# Altium PCB Key-HT16K23.PcbDoc
Units mil, origin at the board's own origin, x right, y up, seen from the top; angles counter-clockwise.
Board outline 1960 x 1940 mil, 2 copper layers (Top Layer, Bottom Layer); 43 components, 33 nets, 196 pads, 175 vias.
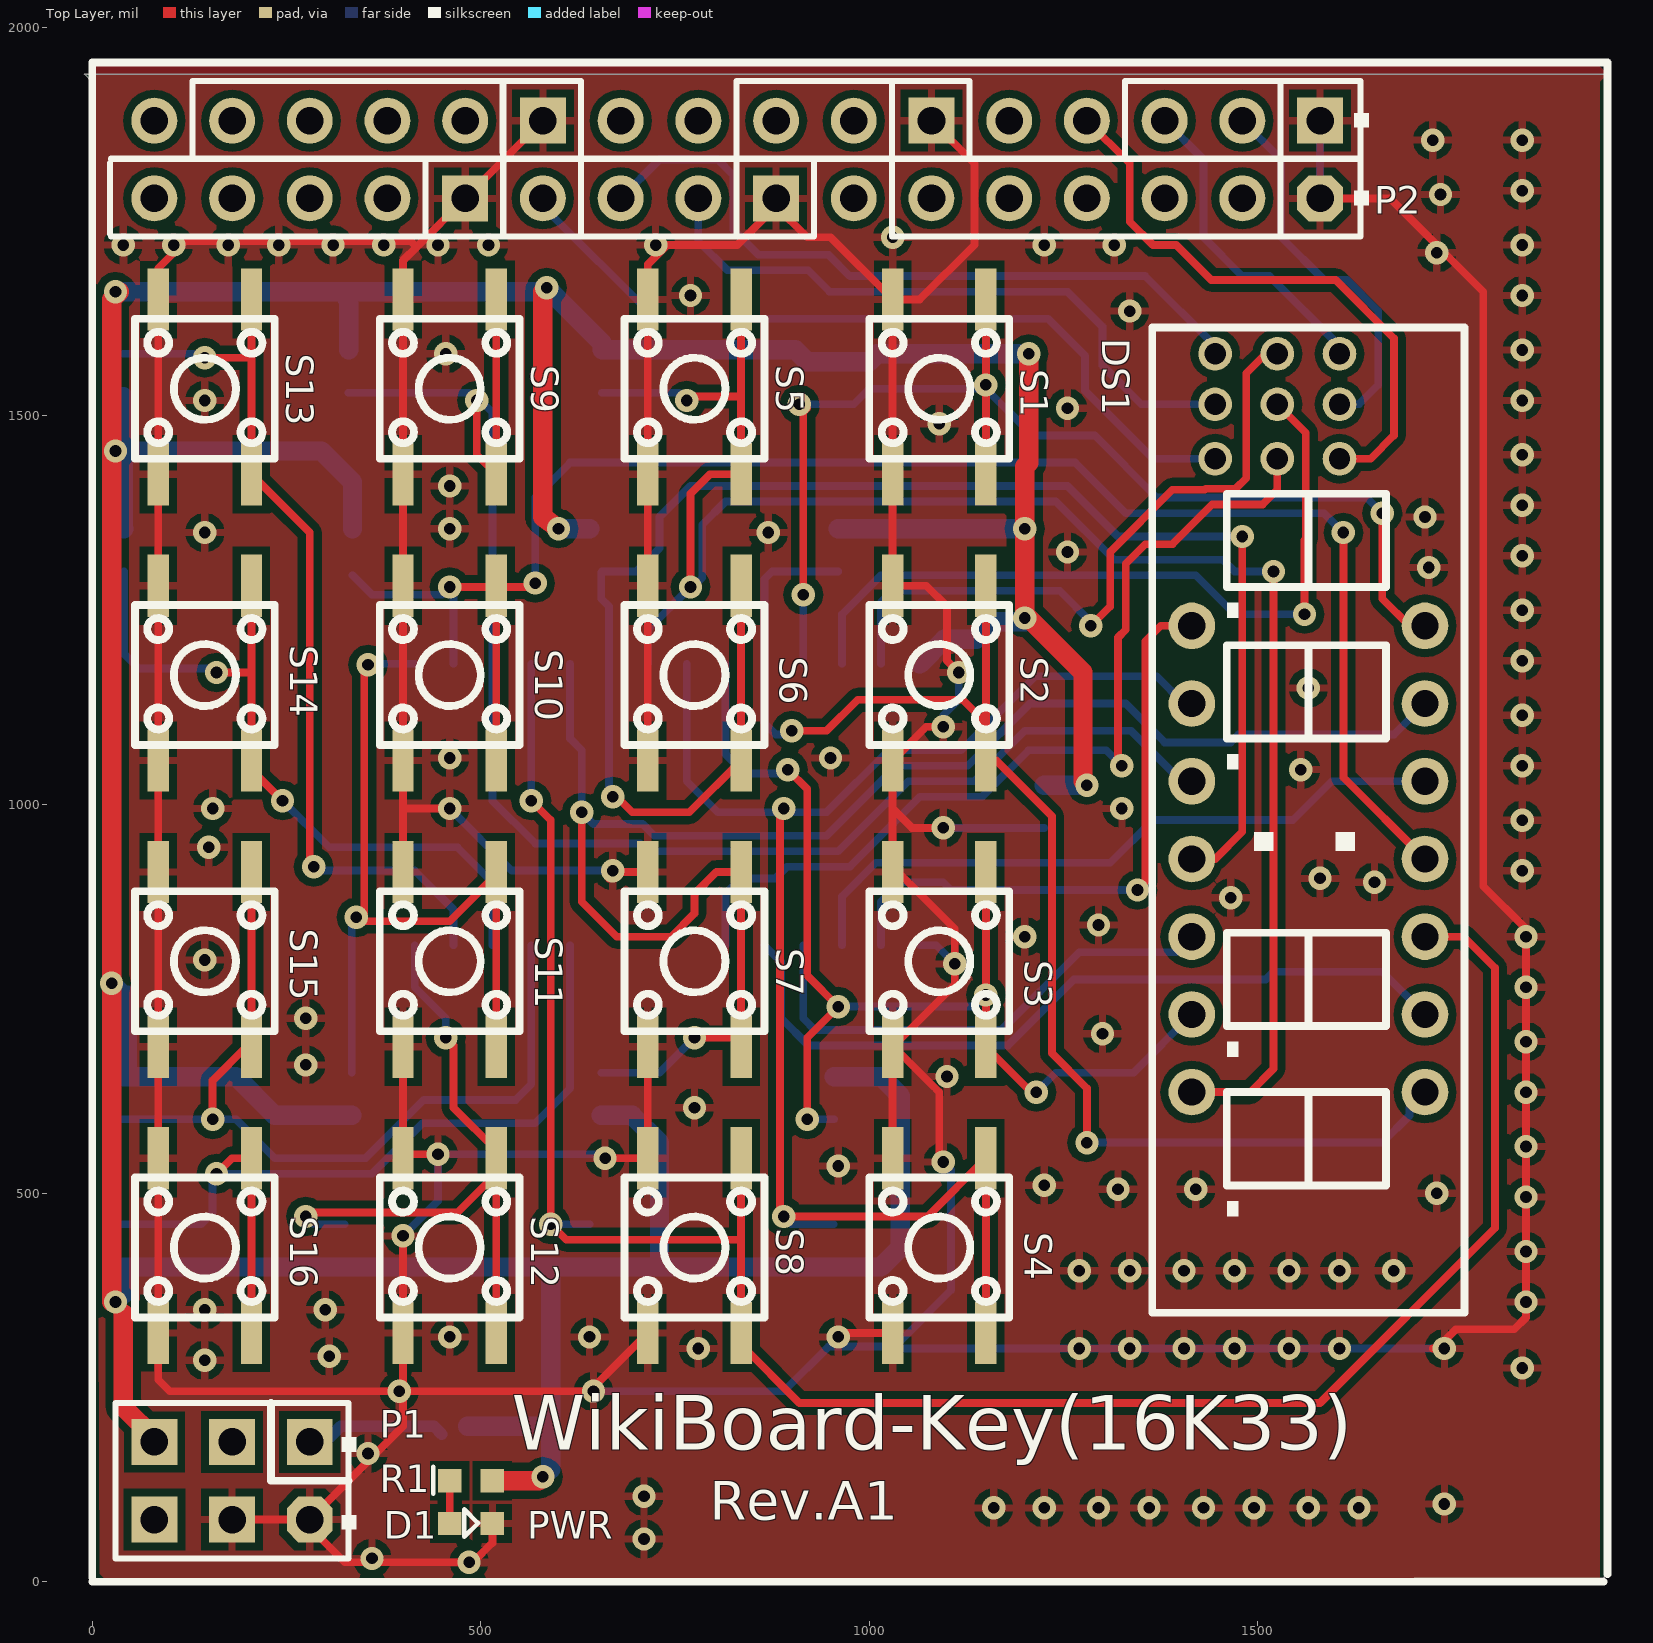
[diagram p0: Top Layer view]
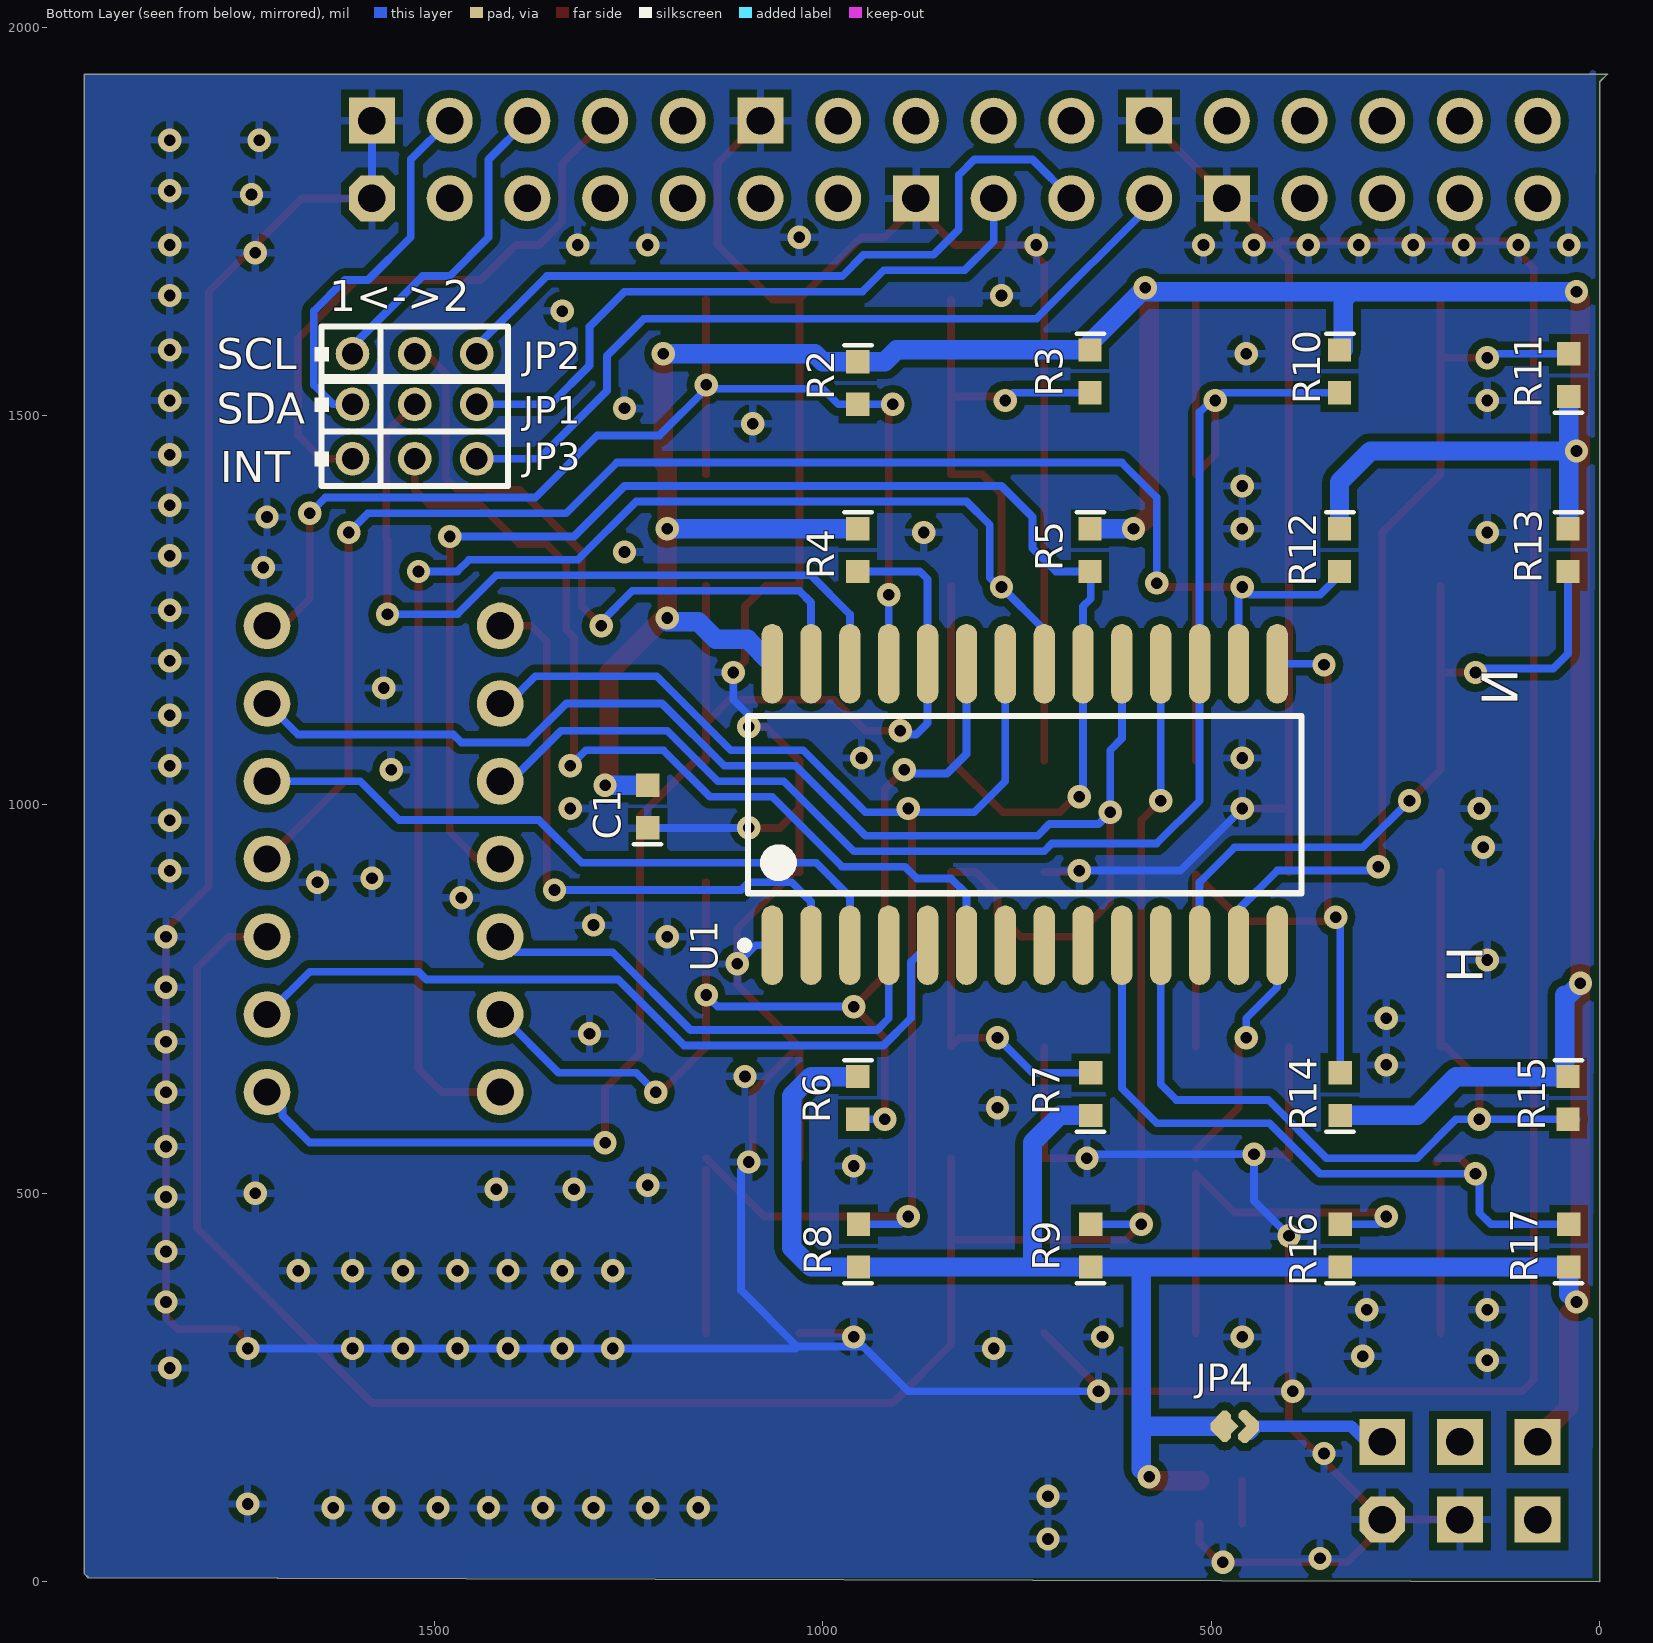
[diagram p1: Bottom Layer view, seen from below]

## Layer stack, top to bottom
Top Solder: solder mask 0.4, Solder Resist, Dk 3.5
Top Layer: signal copper 1.4
Dielectric1: dielectric 12.6, FR-4, Dk 4.8
Bottom Layer: signal copper 1.4
Bottom Solder: solder mask 0.4, Solder Resist, Dk 3.5

## Board outline
1945,5 1950,10 1950,1940 -10,1940 0,1930 0,0

## Design rules (kind name [scope] priority, off if disabled: settings)
Clearance [All] p1: gap=10
PolygonConnect [All] p1: connectstyle=Relief reliefconductorwidth=10 reliefentries=4 polygonreliefangle="90 Angle" airgapwidth=10
RoomDefinition Key-HT16K23 [InComponentClass('Key-HT16K23')] p1: confinementstyle=ConfineIn formatcopy=TRUE lockcomponents=FALSE outline -25,-5 1965,-5 1965,1955 -25,1955
RoutingVias [All] p1: holewidth=15 width=30 viastyle="Through Hole" minholewidth=10 minwidth=20 maxholewidth=28 maxwidth=50
SolderMaskExpansion [All] p1: expansion=4
Width [All] p1: maxlimit=30 minlimit=10 preferedwidth=10
29 further rules are at their usual default settings.

## Components (designator, comment, footprint, x,y, rotation, side; value= is the part's Value field where it differs from the comment)
C1 "0.1uF" 0603M 1225,970 r90 bottom
D1 "RED" 0603pn 460,75 r0 top
DS1 "7SEG-4-Dot" 7SGLED-4-Dot-0.28 1415,1230 r270 top
JP1 "Jumper3" HDR1X3/2.00mm 1605,1515 r180 bottom
JP2 "Jumper3" HDR1X3/2.00mm 1605,1580 r180 bottom
JP3 "Jumper3" HDR1X3/2.00mm 1605,1445 r180 bottom
JP4 "Jumper2-2" JP2_SMD 470,200 r0 bottom
P1 "WIKIPWR" WIKIPWR-6P 280,180 r180 top locked
P2 "WIKIPRHL-R" WIKIPRHL-R 1580,1880 r180 top locked
R1 "1K" 0603M 460,130 r0 top
R2 "10K" 0603M 955,1570 r270 bottom
R3 "10K" 0603M 656,1585 r270 bottom
R4 "10K" 0603M 955,1355 r270 bottom
R5 "10K" 0603M 656,1355 r270 bottom
R6 "10K" 0603M 955,650 r270 bottom
R7 "10K" 0603M 655,600 r90 bottom
R8 "10K" 0603M 954,405 r90 bottom
R9 "10K" 0603M 655,405 r90 bottom
R10 "10K" 0603M 335,1585 r270 bottom
R11 "10K" 0603M 40,1525 r90 bottom
R12 "10K" 0603M 335,1355 r270 bottom
R13 "10K" 0603M 41,1355 r270 bottom
R14 "10K" 0603M 334,600 r90 bottom
R15 "10K" 0603M 41,650 r270 bottom
R16 "10K" 0603M 334,405 r90 bottom
R17 "10K" 0603M 40,405 r90 bottom
S1 "SW-PB" KEY-4.5X4.5-SMD 1090,1535 r270 top
S2 "SW-PB" KEY-4.5X4.5-SMD 1090,1166.67 r270 top
S3 "SW-PB" KEY-4.5X4.5-SMD 1090,798.33 r270 top
S4 "SW-PB" KEY-4.5X4.5-SMD 1090,430 r270 top locked
S5 "SW-PB" KEY-4.5X4.5-SMD 775,1535 r270 top
S6 "SW-PB" KEY-4.5X4.5-SMD 775,1166.67 r270 top
S7 "SW-PB" KEY-4.5X4.5-SMD 775,798.33 r270 top
S8 "SW-PB" KEY-4.5X4.5-SMD 775,430 r270 top
S9 "SW-PB" KEY-4.5X4.5-SMD 460,1535 r270 top
S10 "SW-PB" KEY-4.5X4.5-SMD 460,1166.67 r270 top
S11 "SW-PB" KEY-4.5X4.5-SMD 460,798.33 r270 top
S12 "SW-PB" KEY-4.5X4.5-SMD 460,430 r270 top
S13 "SW-PB" KEY-4.5X4.5-SMD 145,1535 r270 top
S14 "SW-PB" KEY-4.5X4.5-SMD 145,1166.67 r270 top
S15 "SW-PB" KEY-4.5X4.5-SMD 145,798.33 r270 top
S16 "SW-PB" KEY-4.5X4.5-SMD 145,430 r270 top
U1 "HT16K23" SO28_M 740,1000 r90 bottom

## Footprints (in the part's own frame and the unit in brackets; to place one, negate y for a bottom-side part, rotate by r counter-clockwise, add the part's x,y. Pads: shape width x height; smd on the part's side, far side on the other; paste and mask are expansions set on the pad)
7SGLED-4-Dot-0.28 [mil]
  round 60 hole 35: 1(0,0) 2(100,0) 3(200,0) 4(300,0) 5(400,0) 6(500,0) 7(600,0) 8(600,300) 9(500,300) 10(400,300) 11(300,300) 12(200,300) 13(100,300) 14(0,300)
  silkscreen extent -384,-51 884,351
0603M [mil]
  rect 30x30 smd: 1(0,0) 2(55,0)
  silkscreen extent -21,-17 -21,18, body extent -5,-15 60,15, height 43
0603pn [mil]
  rect 30x30 smd: 1(0,0) 2(55,0)
  silkscreen extent 19,-17 36,18
HDR1X3/2.00mm [mm]
  round 1.1 hole 0.7: 1(0,0) 2(2.032,0) 3(4.064,0)
  silkscreen extent -1.24,-0.89 5.08,0.89
JP2_SMD [mil]
  oct 15x30 smd rot 45: 1(-18,-8) 2(18,7)
  oct 15.75x30 smd rot 135: 1(-18,8)
  rect 26x26 smd rot 45: 2(13,0)
  oct 15x30 smd rot 135: 2(18,-7)
KEY-4.5X4.5-SMD [mil]
  rect 80x27.56 smd: 1(-115,-60) 1(110,-60) 2(-115,60) 2(110,60)
  silkscreen extent -90,-90 90,90
SO28_M [mm] "28-Pin Plastic Small Outline Integrated Circuit 1.27 mm Pitch, IPC Low Density"
  oval 2.6x0.7 smd: 1(-4.6,8.255) 2(-4.6,6.985) 3(-4.6,5.715) 4(-4.6,4.445) 5(-4.6,3.175) 6(-4.6,1.905) 7(-4.6,0.635) 8(-4.6,-0.635) 9(-4.6,-1.905) 10(-4.6,-3.175) 11(-4.6,-4.445) 12(-4.6,-5.715) 13(-4.6,-6.985) 14(-4.6,-8.255) 15(4.6,-8.255) 16(4.6,-6.985) 17(4.6,-5.715) 18(4.6,-4.445) 19(4.6,-3.175) 20(4.6,-1.905) 21(4.6,-0.635) 22(4.6,0.635) 23(4.6,1.905) 24(4.6,3.175) 25(4.6,4.445) 26(4.6,5.715) 27(4.6,6.985) 28(4.6,8.255)
  silkscreen extent -4.72,-9.05 2.9,9.28, body extent -3.8,-9.06 3.8,9.06, height 2.65
WIKIPRHL-R [mm] "Connector; Header; 16x2 Position"
  rect 1.5x1.5 hole 0.9: 1(0,0) 11(12.7,0) 16(17.78,2.54) 21(25.4,0) 24(27.94,2.54)
  oct 1.5x1.5 hole 0.9: 2(0,2.54)
  round 1.5 hole 0.9: 3(2.54,0) 4(2.54,2.54) 5(5.08,0) 6(5.08,2.54) 7(7.62,0) 8(7.62,2.54) 9(10.16,0) 10(10.16,2.54) 12(12.7,2.54) 13(15.24,0) 14(15.24,2.54) 15(17.78,0) 17(20.32,0) 18(20.32,2.54) 19(22.86,0) 20(22.86,2.54) 22(25.4,2.54) 23(27.94,0) 25(30.48,0) 26(30.48,2.54) 27(33.02,0) 28(33.02,2.54) 29(35.56,0) 30(35.56,2.54) 31(38.1,0) 32(38.1,2.54)
  silkscreen extent -1.6,-1.3 39.55,3.78, body extent -1.3,-1.63 39.43,4.04, height 8.51
WIKIPWR-6P [mm] "Connector; Header; 3x2 Position"
  rect 1.5x1.5 hole 0.9: 1(0,0) 3(2.54,0) 4(2.54,2.54) 5(5.08,0) 6(5.08,2.54)
  oct 1.5x1.5 hole 0.9: 2(0,2.54)
  silkscreen extent -1.52,-1.27 6.35,3.81, body extent -1.21,-1.65 6.44,4.02, height 8.51

## Part data
C1: library part Cap, "Capacitor"
D1: library part LED0, "Typical INFRARED GaAs LED"
DS1: "Black Surface HER 7-Segment Display"
JP4: "Jumper2"
P1: "PWR HDR"
P2: "Header, 16-Pin, Dual row"
R1 R2 R3 R4 R5 R6 R7 R8 R9 R10 R11 R12 R13 R14 R15 R16 R17: library part Res2, "Resistor"
S1 S2 S3 S4 S5 S6 S7 S8 S9 S10 S11 S12 S13 S14 S15 S16: "Switch"
U1: "LCD Driver with keyscan"

## Via types
v1: diameter 30, hole 15, Top Layer to Bottom Layer, 175 vias

## Nets (pads, with @x,y where several pads share a name; then routed paths per layer and width w, separated by ;. In a path a pad name is that pad's centre, name@x,y a point inside that pad or via, vN(x,y) a via of type N, cw(c..) or ccw(c..) an arc to the next point about the centre after c; other vN are vias at no path point)
COM0: DS1.1 U1.2 | length 793
  Top Layer w10: v1(1345,890) 1355,900 1355,1210 1375,1230 DS1.1
  Bottom Layer w10: U1.2 1015,875 1040,900 1095,900 1105,890 v1(1345,890)
COM1: DS1.12 U1.3 | length 874.2
  Bottom Layer w10: U1.3 965,881.72 1008.28,925 1310,925 1365,980 1545,980 1595,1030 DS1.12
COM2: DS1.5 U1.4 | length 649.8
  Bottom Layer w10: U1.4 915,725 930,710 1170,710 1270,810 1395,810 DS1.5
COM3: DS1.9 U1.5 | length 1007.8
  Bottom Layer w10: U1.5 886.22,797.68 886.22,725.5 921.72,690 1178.28,690 1263.28,775 1510,775 1520,785 1660,785 DS1.9
GND: C1.1 D1.2 P1.2 P1.4 P2.1 P2.2 P2.11 P2.16 P2.21 P2.24 S1.1 S2.1 S3.1 S4.1 S5.1 S6.1 S7.1 S8.1 S9.1 S10.1 S11.1 S12.1 S13.1 S14.1 S15.1 S16.1 U1.1 | length 11774.5
  Top Layer w10: P1.4 P1.2 ; v1(400,445) 400,320 v1@400,245 ; S11.1@400,688.33 400,545 405,550 v1(445,550) ; S11.1@400,913.33 400,995 ; v1(460,995) 400,995 ; D1.2 515,50 490,25 325,25 280,70 P1.2 ; P2.21 P2.24 417.5,1717.5 ; v1(645,245) v1@640,245 ; v1(660,545) 715,545 S7.1@715,688.33 ; v1(670,915) 665,910 665,905 673.33,913.33 S7.1@715,913.33 ; S8.1@715,320 v1@640,245 ; S6.1@715,1056.67 715,1281.67 715,1425 715,1650 715,1695 740,1720 830,1720 880,1770 920,1730 950,1730 S1.1@1030,1650 ; v1(960,315) 965,320 S4.1@1030,320 ; S4.1@1030,545 S3.1@1030,688.33 ; P2.11 1135.47,1824.53 1135.47,1720.47 1065,1650 S1.1@1030,1650 ; v1(1095,540) 1090,545 1090,630 1031.67,688.33 S3.1@1030,688.33 ; v1(1095,970) 1055,970 1030,995 1030,1005 ; v1(1095,1100) 1073.33,1100 1030,1056.67 1030,1005 ; v1(1115,1170) 1100,1185 1100,1255 1073.33,1281.67 1030,1281.67 1030,1425 S1.1@1030,1650 ; P2.2 1670,1780 1790,1660 1790,895 1845,840 1845,340 1830,325 1755,325 1730,300 v1@1725,300 ; P1.2 400,200 v1@400,245 ; v1@400,245 v1@640,245 ; v1@400,245 100,245 85,260 85,320 85,545 85,688.33 85,913.33 85,1056.67 85,1281.67 85,1425 85,1650 85,1690 120,1725 410,1725 417.5,1717.5 ; 400,995 400,1056.67 400,1281.67 400,1425 400,1650 400,1700 417.5,1717.5 ; S3.1@1030,688.33 1110,768.33 v1(1110,795) 1110,840 1036.67,913.33 1030,913.33 1030,1005
  Bottom Layer w10: v1(400,445) 445,490 v1(445,550) 655,550 v1(660,545) ; v1(460,995) 540,915 v1(670,915) ; v1(645,245) 890,245 947.5,302.5 1032.5,302.5 ; U1.1 1086.1,818.9 v1(1110,795) ; v1(1095,540) 1105,530 1105,375 1032.5,302.5 ; v1(1095,970) C1.1 ; v1(1095,1100) 1095,1115 1115,1135 v1(1115,1170) ; P2.2 P2.1 ; v1@1725,300 1035,300 1032.5,302.5
  other v1: 485,25 360,30 710,55 1160,95 1225,95 1295,95 1360,95 1430,95 1495,95 1565,95 1630,95 1740,100 710,110 355,165 395,245 1840,275 145,285 305,290 780,300 1270,300 1335,300 1405,300 1470,300 1540,300 1605,300 1740,300 460,315 640,315 145,350 300,350 1845,360 1270,400 1335,400 1405,400 1470,400 1540,400 1605,400 1675,400 1845,425 1845,495 1730,500 1320,505 1420,505 1225,510 960,535 1845,560 775,610 1845,630 1100,650 275,665 1845,695 1300,705 275,725 1845,765 145,800 1200,830 1845,830 1295,845 1465,880 1650,900 1580,905 1840,915 150,945 1840,980 155,995 1325,995 1555,1045 1840,1050 460,1060 950,1060 1840,1115 1565,1150 1840,1185 1840,1250 1720,1305 1840,1320 1255,1325 145,1350 870,1350 460,1355 1715,1370 1840,1385 1840,1385 460,1410 1840,1450 1090,1490 1255,1510 145,1520 1840,1520 455,1580 1840,1585 1335,1635 770,1655 1840,1655 1730,1710 40,1720 105,1720 175,1720 240,1720 310,1720 375,1720 445,1720 510,1720 725,1720 1225,1720 1315,1720 1840,1720 1030,1730 1735,1785 1840,1790 1725,1855 1840,1855
HT_INT: JP3.2 U1.6 | length 1201.6
  Top Layer w10: v1(1325,1050) 1320,1055 1320,1215 1330,1225 1330,1310 1355,1335 1390,1335 1441.25,1386.25 1506.25,1386.25 1525,1405 JP3.2
  Bottom Layer w10: U1.6 815,885 835,905 878.99,905 893.99,920 975,920 1065,1010 1145,1010 1205,1070 1305,1070 v1(1325,1050)
HT_INT1: JP3.1 P2.7 | length 762.3
  Top Layer w10: P2.7 1335,1825 1335,1750 1365,1720 1395,1720 1440,1675 1600,1675 1675,1600 1675,1475 1645,1445 JP3.1
HT_INT2: JP3.3 P2.22 | length 1036
  Bottom Layer w10: P2.22 580,1770 725,1625 1230,1625 1277.5,1577.5 1277.5,1532.5 1365,1445 JP3.3
HT_SCL: JP2.2 U1.27 | length 881.7
  Top Layer w10: v1(1285,1230) 1310,1255 1310,1325 1390,1405 1431.72,1405 1432.97,1406.25 1471.25,1406.25 1485,1420 1485,1555 1510,1580 JP2.2
  Bottom Layer w10: U1.27 1015,1260 1030,1275 1245,1275 1285,1235 v1(1285,1230)
HT_SCL1: JP2.1 P2.5 | length 413.7
  Bottom Layer w10: P2.5 1430,1830 1430,1730 1480,1680 1515,1680 1605,1590 JP2.1
HT_SCL2: JP2.3 P2.20 | length 946.1
  Bottom Layer w10: P2.20@680,1770 P2.20 730,1830 805,1830 825,1810 825,1740 857.5,1707.5 947.5,1707.5 975,1680 1355,1680 1445,1590 JP2.3
HT_SDA: JP1.2 U1.26 | length 986.2
  Top Layer w10: JP1.2 1561.65,1478.35 1561.65,1341.65 1560,1340 v1(1560,1245)
  Bottom Layer w10: U1.26 965,1245 1015,1295 1420,1295 1470,1245 v1(1560,1245)
HT_SDA1: JP1.1 P2.3 | length 490.4
  Bottom Layer w10: P2.3 1530,1830 1530,1730 1585,1675 1615,1675 1655,1635 1655,1540 1630,1515 JP1.1
HT_SDA2: JP1.3 P2.18 | length 836.3
  Bottom Layer w10: P2.18 780,1725 817.5,1687.5 921.39,1687.5 948.89,1660 1255,1660 1300,1615 1300,1565 1350,1515 JP1.3
NetD1_1: D1.1 R1.1 | length 55
  Top Layer w10: D1.1 R1.1
NetJP4_1: JP4.1 P1.1 | length 182.4
  Bottom Layer w15: P1.1 300,180 320,200 439.87,200 JP4.1@449.93,189.93
PVDD: C1.2 JP4.2 P1.5 R1.2 R2.1 R3.1 R4.1 R5.1 R6.1 R7.1 R8.1 R9.1 R10.1 R11.1 R12.1 R13.1 R14.1 R15.1 R16.1 R17.1 U1.28 | length 7256.4
  Top Layer w25: v1@25,360 v1(25,770) 25,1650 35,1660 v1(30,1660) ; 40,345 40,225 80,185 P1.5 ; R1.2 575,130 v1(580,135) ; v1(585,1665) 580,1660 580,1370 v1(600,1355) ; v1(1205,1580) 1205,1440 1200,1435 v1(1200,1355) v1(1200,1240) 1205,1240 1275,1170 1275,1030 v1(1280,1025)
  Bottom Layer w25: v1(25,770) 40,755 45,755 45,654 R15.1 185,650 235,600 R14.1 ; v1(30,360) 40,370 R17.1 R16.1 590,405 ; v1(30,1660) 320,1660 ; R11.1 40,1465 v1(30,1455) v1@40,1455 ; R13.1 40,1356 v1@40,1455 ; R10.1@330,1585 330,1650 320,1660 ; R12.1 335,1415 295,1455 v1@40,1455 ; JP4.2@483,200 590,200 ; v1(580,135) 590,145 590,200 ; v1(585,1665) v1@590,1660 ; v1(600,1355) 640,1355 ; R7.1 695,600 730,565 730,405 ; R6.1 1015,650 1040,625 1040,430 1015,405 730,405 ; R4.1@960,1355 v1(1200,1355) ; U1.28 1096.4,1212.5 1137.5,1212.5 1160,1235 v1@1200,1235 ; v1(1205,1580) 1010,1580 1000,1570 R2.1 920,1570 905,1585 R3.1 656,1594 v1@590,1660 ; C1.2 v1(1280,1025) ; 320,1660 v1@590,1660 ; 590,200 590,405 ; 590,405 R9.1 730,405
SEG0: DS1.14 R2.2 S1.2 U1.25 | length 1577.1
  Top Layer w10: v1(910,1515) 915,1510 920,1510 915,1505 v1(915,1270) ; S1.2@1150,1425 v1(1150,1540) S1.2@1150,1650 ; v1(1660,1375) 1660,1265 1695,1230 DS1.14
  Bottom Layer w10: v1(910,1515) R2.2 980,1515 1000,1535 v1@1150,1535 ; U1.25 v1(915,1270) ; v1(1150,1540) v1@1150,1535 ; v1(1660,1375) 1640,1395 1370,1395 1290,1475 1210,1475 v1@1150,1535
SEG1: DS1.8 R4.2 S2.2 U1.24 | length 1855.5
  Top Layer w10: v1(900,1095) 945,1095 985,1135 1120,1135 1150,1105 ; S2.2@1150,1281.67 1150,1105 ; v1(1280,565) 1280,635 1235,680 1235,985 1163.33,1056.67 1150,1056.67 1150,1105
  Bottom Layer w10: v1(900,1095) 900,1090 880,1090 865,1105 U1.24 865,1290 875,1300 R4.2@960,1300 ; v1(1280,565) 1660,565 1695,600 1695,610 DS1.8
SEG2: DS1.6 R6.2 S3.2 U1.23 | length 1475.5
  Top Layer w10: v1(895,1045) 920,1020 920,780 v1(960,740) 920,700 v1(920,595) ; S3.2@1150,900 v1(1150,755) 1150,688.33 1208.33,630 v1(1215,630)
  Bottom Layer w10: U1.23 815,1065 840,1040 890,1040 v1(895,1045) ; v1(920,595) R6.2 ; v1(960,740) 1135,740 v1(1150,755) ; v1(1215,630) 1240,655 1340,655 DS1.6
SEG3: DS1.2 R8.2 S4.2 U1.22 | length 2003
  Top Layer w10: v1(890,995) 885,990 885,475 v1(890,470) 1075,470 S4.2@1150,545 ; S4.2@1150,320 S4.2@1150,530
  Bottom Layer w10: U1.22 765,1030 805,990 945,990 1025,1070 1118.43,1070 1213.43,1165 1370,1165 1405,1130 DS1.2 ; v1(890,470) 900,460 R8.2
SEG4: DS1.7 R3.2 S5.2 U1.21 | length 2352.5
  Top Layer w10: v1(765,1520) 770,1525 830,1525 ; v1(770,1280) 770,1400 795,1425 835,1425 S5.2@835,1650 ; DS1.7 1490,630 1520,660 v1(1520,1300)
  Bottom Layer w10: R3.2 755,1530 v1(765,1520) ; U1.21 715,1225 v1(770,1280) 773.28,1280 785,1291.72 785,1360 815,1390 1240,1390 1315,1315 1455,1315 1470,1300 v1(1520,1300)
SEG5: DS1.4 R5.2 S6.2 U1.20 | length 2100.5
  Top Layer w10: v1@672.5,1012.5 695,990 768.33,990 835,1056.67 S6.2@835,1281.67 ; DS1.4 1445,930 1480,965 v1(1480,1345)
  Bottom Layer w10: v1(670,1010) 665,1015 U1.20 665,1255 655,1265 655,1299 R5.2 700,1300 730,1330 730,1370 770,1410 1255,1410 1320,1345 v1(1480,1345)
SEG6: DS1.13 R7.2 S7.2 U1.19 | length 2232.9
  Top Layer w10: v1(630,990) 630,875 675,830 745,830 775,860 775,885 803.33,913.33 835,913.33 835,688.33 823.33,700 v1(775,700)
  Bottom Layer w10: U1.19 615,1085 630,1070 v1(630,990) 645,975 708.28,975 723.28,960 945,960 1035,1050 1126.72,1050 1206.72,1130 1330,1130 1380,1080 1465,1080 1475,1090 1675,1090 DS1.13 ; R7.2 730,655 v1(775,700) v1@765,700
SEG7: DS1.10 R9.2 S8.2 U1.18 | length 2810.6
  Top Layer w10: v1(565,1005) 590,980 v1(590,460) 610,440 835,440 ; S8.2@835,545 835,440 ; DS1.10 1765,830 1805,790 1805,455 1580,230 910,230 835,305 835,320 835,440
  Bottom Layer w10: v1(565,1005) U1.18 ; v1(590,460) R9.2@640,460
SEG8: DS1.3 R10.2 S9.2 U1.17 | length 2050.8
  Top Layer w10: v1(495,1520) 495,1450 520,1425 S9.2@520,1650
  Bottom Layer w10: R10.2@330,1530 485,1530 v1(495,1520) 495,1525 515,1505 U1.17 515,1005 570,950 705,950 715,940 960,940 1050,1030 1135,1030 1200,1095 1336.72,1095 1401.72,1030 DS1.3
SEG9: DS1.11 R12.2 S10.2 U1.16 | length 2245.3
  Top Layer w10: v1(460,1280) S10.2@520,1280 ; S10.2@520,1056.67 S10.2@520,1280 ; v1(570,1285) 565,1280 S10.2@520,1280 ; v1(1610,1350) 1610,1035 DS1.11
  Bottom Layer w10: R12.2@335,1295 360,1270 450,1270 v1(460,1280) 465,1275 U1.16 ; v1(570,1285) 570,1395 615,1440 1265,1440 1330,1375 1585,1375 v1(1610,1350)
SEG10: R14.2 S11.2 U1.15 | length 1018.6
  Top Layer w10: v1(355,1180) 350,1175 350,855 345,850 460,850 520,910 S11.2@520,688.33
  Bottom Layer w10: R14.2 334,849 v1(340,855) ; v1(355,1180) 356.1,1181.1 U1.15
SEG11: R16.2 S12.2 U1.14 | length 854.3
  Top Layer w10: v1(275,470) 270,470 275,475 470,475 520,525 S12.2@520,320 ; v1(455,700) 465,690 465,610 520,555 S12.2@520,545
  Bottom Layer w10: v1(275,470) 285,460 R16.2@325,460 ; U1.14 415,765 455,725 v1(455,700)
SEG12: R11.2 S13.2 U1.13 | length 1179.1
  Top Layer w10: v1(145,1575) 205,1575 ; S13.2@205,1650 205,1575 ; v1(285,920) 280,925 280,1350 205,1425 205,1575
  Bottom Layer w10: R11.2 140,1580 v1(145,1575) ; v1(285,920) 290,915 415,915 465,865 U1.13
SEG13: R13.2 S14.2 U1.12 | length 968.1
  Top Layer w10: v1(160,1170) 204.17,1170 205,1169.17 ; S14.2@205,1281.67 205,1169.17 ; v1(245,1005) 205,1045 205,1056.67 205,1169.17
  Bottom Layer w10: R13.2 41,1194 60,1175 155,1175 v1(160,1170) ; v1(245,1005) 305,945 470,945 515,900 U1.12
SEG14: R15.2 S15.2 U1.11 | length 1116.9
  Top Layer w10: v1(155,595) 155,645 198.33,688.33 205,688.33 S15.2@205,913.33
  Bottom Layer w10: R15.2@30,595 v1(155,595) 185,595 235,545 351.72,545 426.72,620 545,620 565,640 U1.11
SEG15: R17.2 S16.2 U1.10 | length 1133.1
  Top Layer w10: v1(160,525) 180,545 205,545 S16.2@210,540 ; S16.2@205,320 S16.2@205,525
  Bottom Layer w10: R17.2@30,460 140,460 155,475 155,520 v1(160,525) 360,525 425,590 570,590 615,635 U1.10
pads on no net: P1.3 P1.6 P2.4 P2.6 P2.8 P2.9 P2.10 P2.12 P2.13 P2.14 P2.15 P2.17 P2.19 P2.23 P2.25 P2.26 P2.27 P2.28 P2.29 P2.30 P2.31 P2.32 U1.7 U1.8 U1.9

## Polygon pours and split planes (outlines as drawn)
GND on Top Layer "TL-GND" (solid, remove dead copper, pour order 4): 10,10 15,5 1940,5 1940,1930 1950,1940 1935,1955 0,1955
GND on Bottom Layer "TL-GND" (solid, remove dead copper, pour order 2): 5,1950 15,1940 1950,1940 1950,10 1945,5 10,5

## Silkscreen, mask and mechanical layers (free items; w line width, h text height)
Top Overlay:
  lines w10: 0,0 1945,0 ; 0,5 0,1955 1950,1955 1950,10
  text "WikiBoard-Key(16K33)" at 540,170 h70
  text "Rev.A1" at 795,80 h50
  text "PWR" at 560,55 h35
Bottom Overlay:
  text "1<->2" at 1635,1635 h40
  text "SCL" at 1780,1560 h40
  text "SDA" at 1780,1490 h40
  text "INT" at 1775,1415 h40
  text "N" at 90,1175 h80 r270
  text "H" at 135,770 h80 r270